# Altium PCB buoy_controller_v1.PcbDoc
Units mm, origin at the board's own origin, x right, y up, seen from the top; angles counter-clockwise.
Board outline 65 x 85 mm, 4 copper layers (Top Layer 1, Mid Layer 1, Mid Layer 2, Bottom Layer 1), stack 0.487 mm thick; 37 components, 33 nets, 180 pads, 75 vias.
Unrouted connection lines stored in the file: 37.
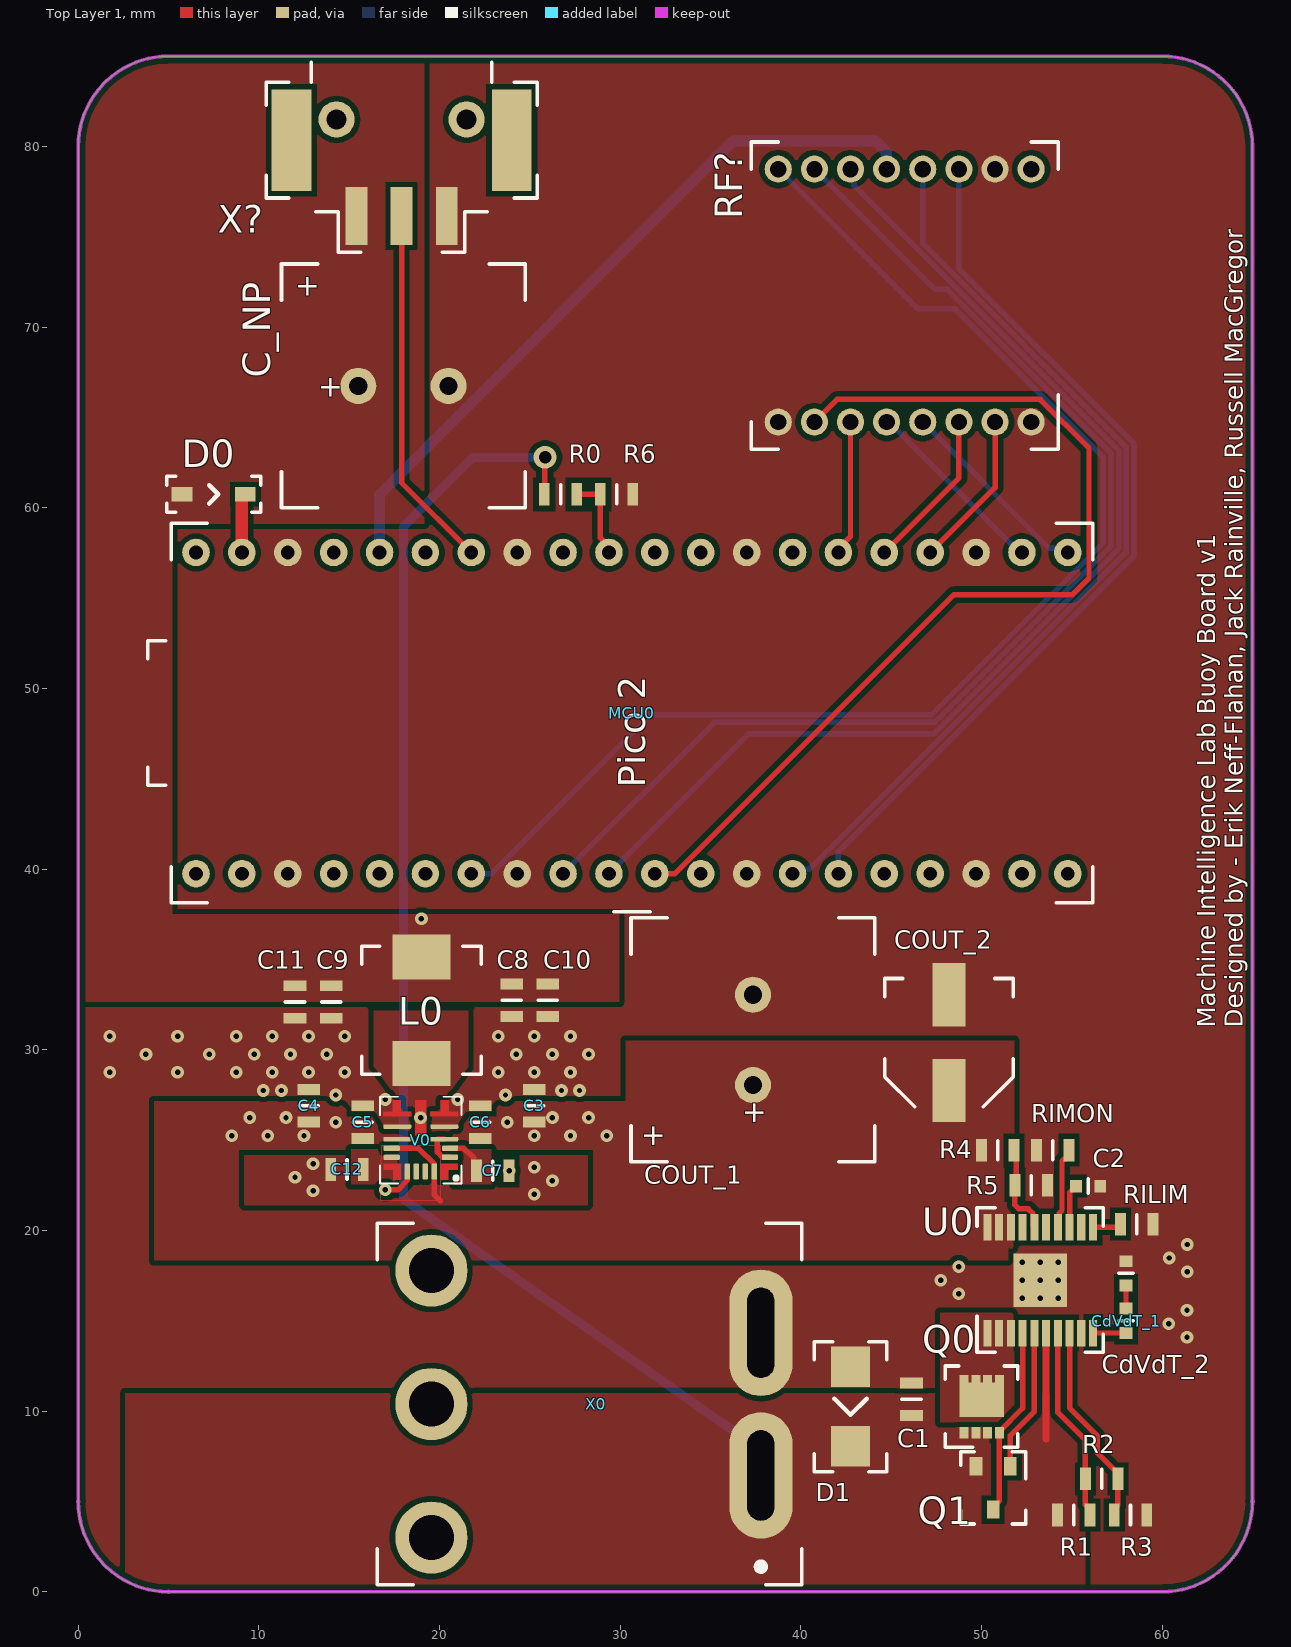
[diagram p0: Top Layer 1 view]
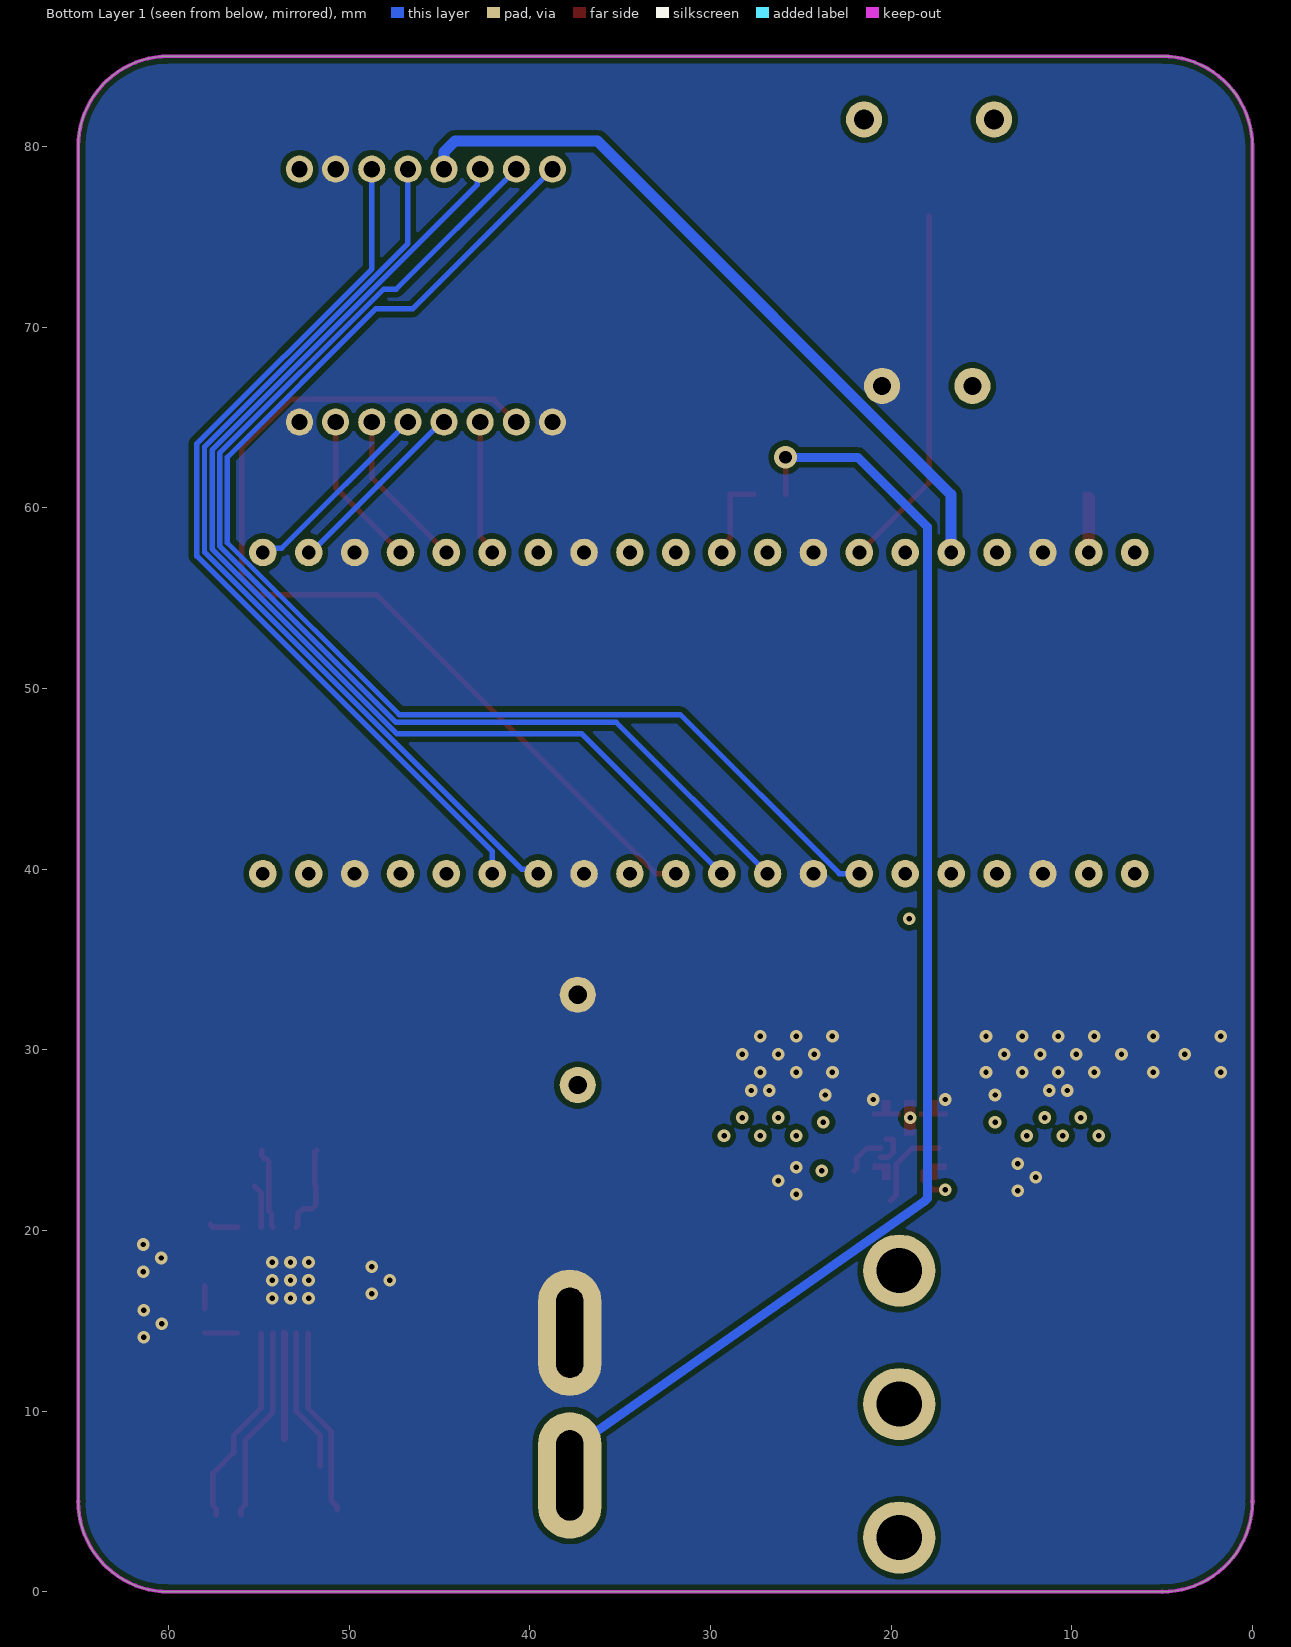
[diagram p1: Bottom Layer 1 view, seen from below]
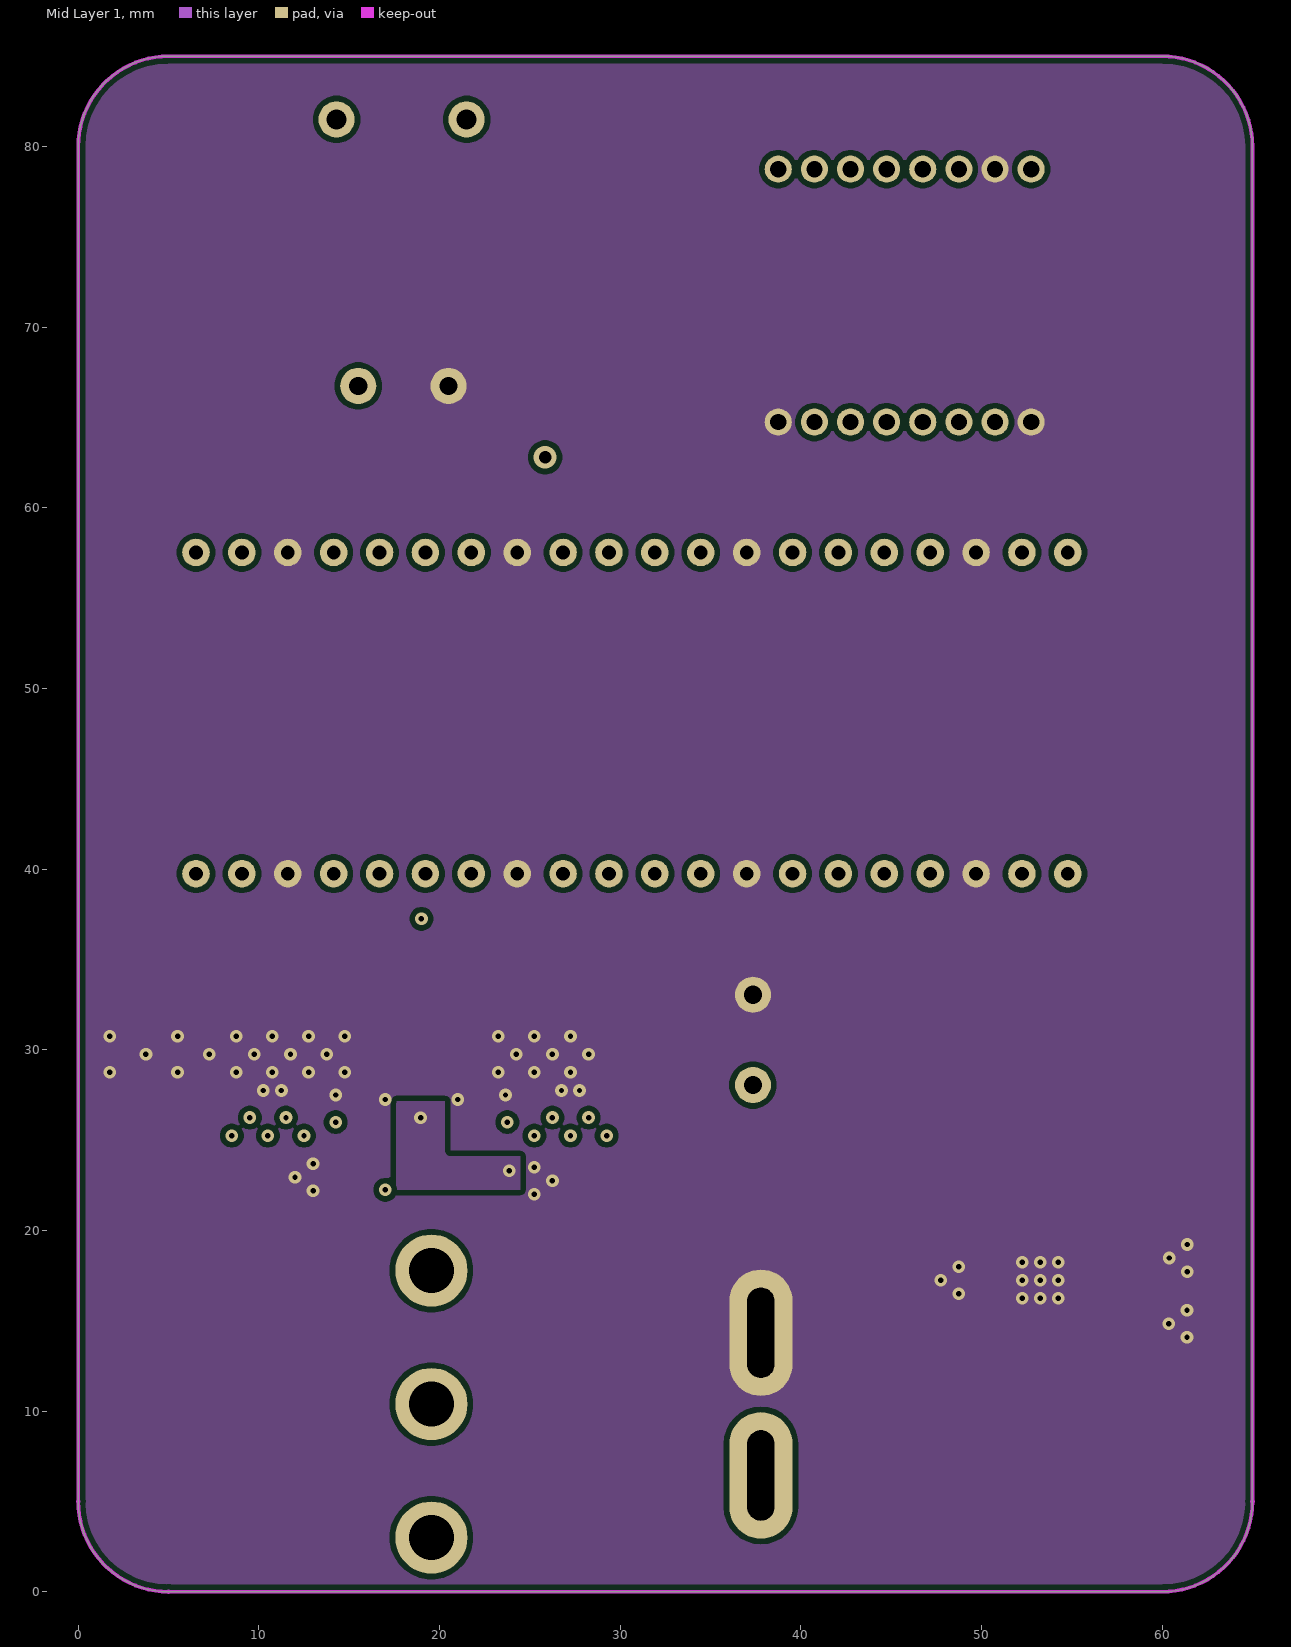
[diagram p2: Mid Layer 1]
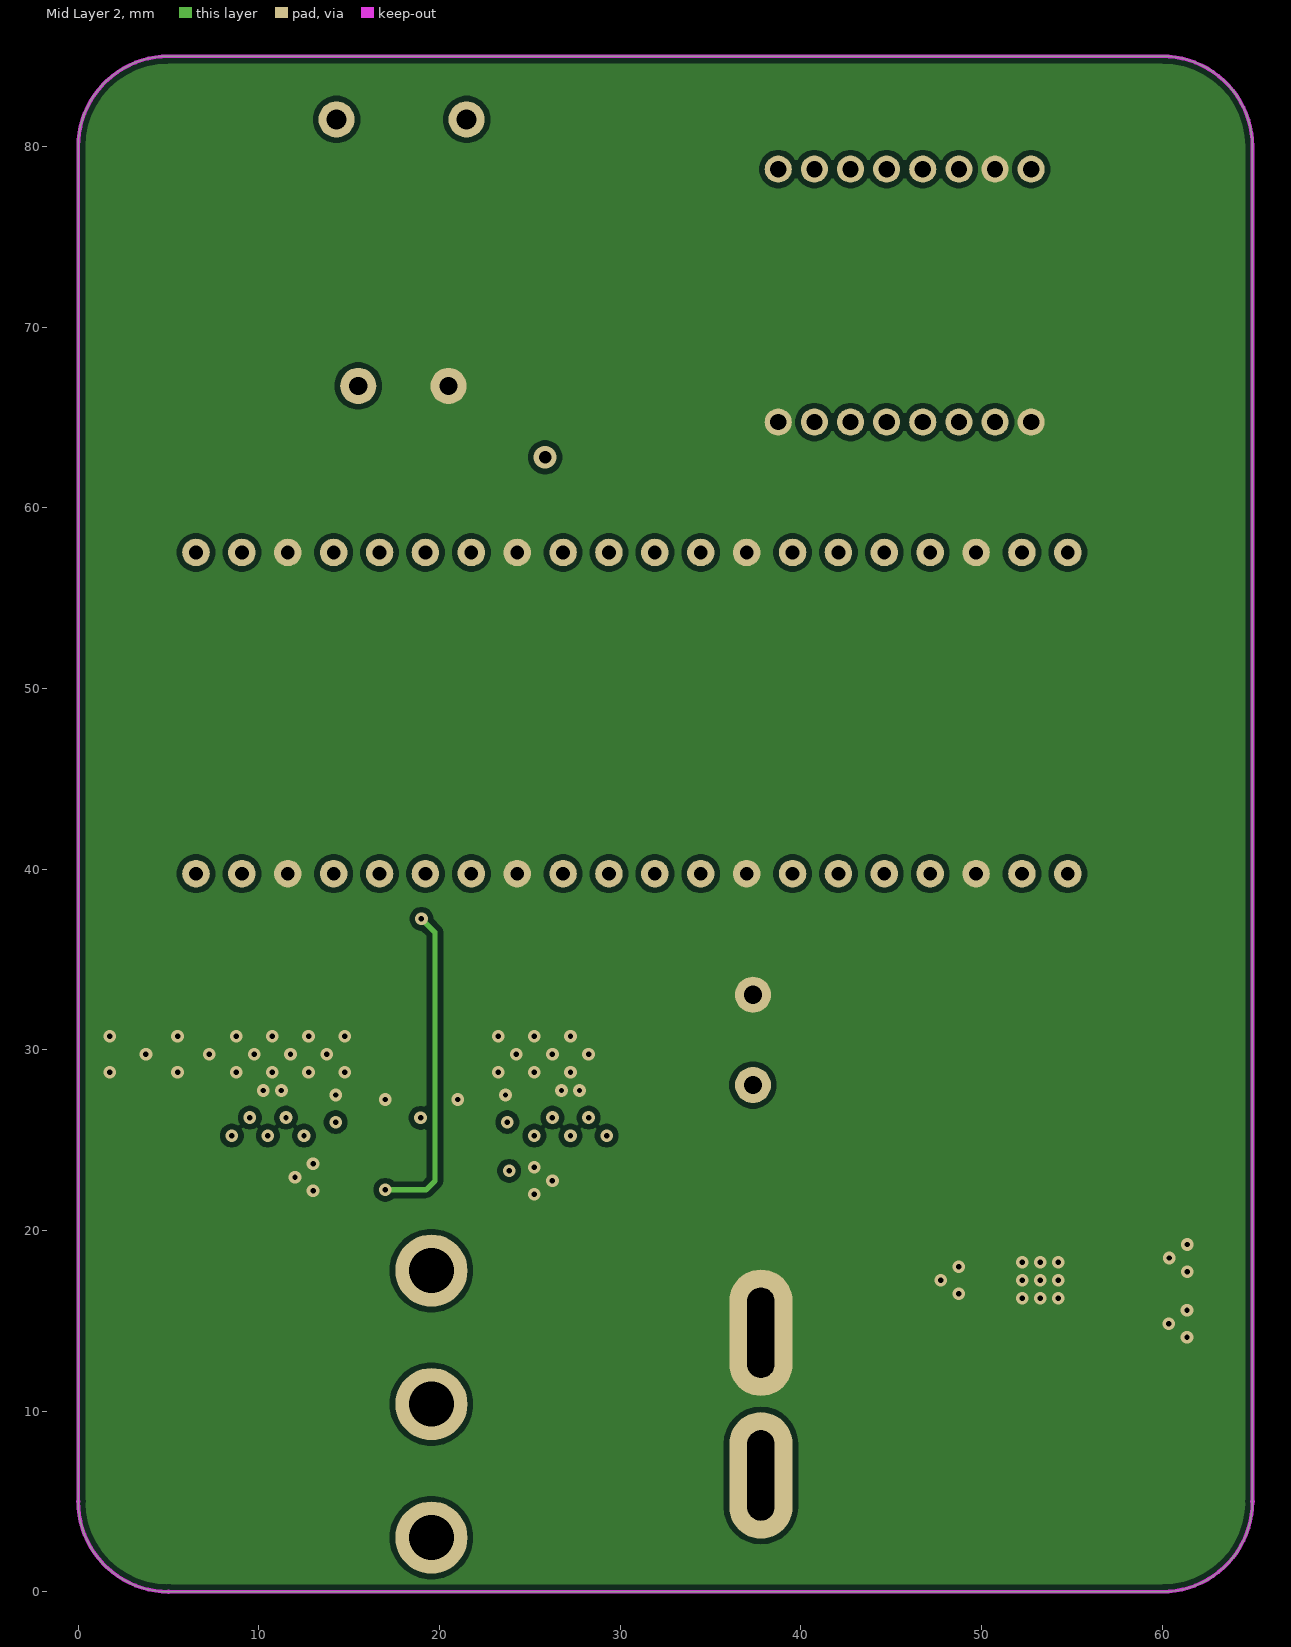
[diagram p3: Mid Layer 2]

## Layer stack, top to bottom
Top Solder: solder mask 0.0102, Solder Resist, Dk 3.5
Top Layer 1: signal copper 0.035
Dielectric 2: prepreg 0.0711, PP-006, Dk 4.1
Mid Layer 1: signal copper 0.0356
Dielectric 1: core 0.2032, Core-025, Dk 4.6
Mid Layer 2: signal copper 0.0356
Dielectric 3: prepreg 0.0711, PP-006, Dk 4.1
Bottom Layer 1: signal copper 0.035
Bottom Solder: solder mask 0.0102, Solder Resist, Dk 3.5

## Board outline
5,0 cw(c5,5) 0,5 0,80 cw(c5,80) 5,85 60,85 cw(c60,80) 65,80 65,5 cw(c60,5) 60,0

## Design rules (kind name [scope] priority, off if disabled: settings)
BoardOutlineClearance [All] p1: gap=0.2 ignorepadtopadclearanceinfootprint=FALSE
Clearance "inPolygon Clearance" [InPolygon] p1: gap=0.3 ignorepadtopadclearanceinfootprint=TRUE // this rule ensures that every net within a polygon of a different net has a set clearance from the poly
Clearance "High Current Polygon Clearance" [(InPolygon AND InNetClass('High_Current_Nets'))] p2: gap=0 ignorepadtopadclearanceinfootprint=TRUE // this rule ensures that every net within a polygon of a different net has a set clearance from the poly
Clearance "Different Diff Pair" [All] p3: gap=0.2 ignorepadtopadclearanceinfootprint=TRUE
Clearance "Same Diff Pair" [All] p4: gap=0.1 ignorepadtopadclearanceinfootprint=TRUE
Clearance "Different Nets" [not InAnyDifferentialPair] p5: gap=0.3 ignorepadtopadclearanceinfootprint=TRUE except(0.1: Arc-SMDPad Arc-THPad Arc-Via Arc-Text Track-SMDPad Track-THPad Track-Via Track-Text SMDPad-Text THPad-Text Via-Text Fill-Text Poly-Text Region-Text Text-Text; 0.12: Arc-Arc Arc-Track Track-Track; 0.15: SMDPad-SMDPad SMDPad-THPad SMDPad-Via THPad-THPad THPad-Via Via-Via; 0.2: Arc-Hole Track-Hole SMDPad-Hole THPad-Hole Via-Hole Fill-Hole Poly-Hole Region-Hole Text-Hole)
Clearance "Same Net" [not InAnyDifferentialPair] p6: gap=0 ignorepadtopadclearanceinfootprint=TRUE except(0.1: THPad-Via; 0.18: Arc-Arc Arc-Track Track-Track)
ComponentClearance [All] p1: gap=0.102 collisioncheckmode=3 verticalgap=0.102 showdistances=TRUE
DiffPairsRouting "Ethernet Routing" [InDifferentialPairClass('Ethernet_Pairs')] p1: maxlimit=0.25 minlimit=0.2 mostfreqgap=0.25 toplayer_maxgap=0.2 toplayer_prefgap=0.2 toplayer_minwidth=0.25 toplayer_maxwidth=0.25 toplayer_prefwidth=0.25 midlayer1_mingap=0.25 midlayer1_minwidth=0.19 midlayer1_maxwidth=0.19 midlayer1_prefwidth=0.19 midlayer2_mingap=0.25 midlayer2_minwidth=0.19 midlayer2_maxwidth=0.19 midlayer2_prefwidth=0.19 bottomlayer_maxgap=0.2 bottomlayer_prefgap=0.2 bottomlayer_minwidth=0.25 bottomlayer_maxwidth=0.25 bottomlayer_prefwidth=0.25 impedanceprofiledriven=TRUE maxuncoupledlength=12.7
DiffPairsRouting "USB Routing" [InDifferentialPairClass('USB_Pairs')] p2: maxlimit=0.291 minlimit=0.127 mostfreqgap=0.291 toplayer_maxgap=0.127 toplayer_prefgap=0.127 toplayer_minwidth=0.23 toplayer_maxwidth=0.23 toplayer_prefwidth=0.23 midlayer1_mingap=0.291 midlayer1_minwidth=0.25 midlayer1_maxwidth=0.25 midlayer1_prefwidth=0.25 midlayer2_mingap=0.291 midlayer2_minwidth=0.25 midlayer2_maxwidth=0.25 midlayer2_prefwidth=0.25 bottomlayer_maxgap=0.127 bottomlayer_prefgap=0.127 bottomlayer_minwidth=0.23 bottomlayer_maxwidth=0.23 bottomlayer_prefwidth=0.23 maxuncoupledlength=12.7
DiffPairsRouting "CAN Routing" [InDifferentialPairClass('CAN_Pairs')] p3: maxlimit=0.907 minlimit=0.5 mostfreqgap=0.907 toplayer_maxgap=0.5 toplayer_prefgap=0.5 toplayer_minwidth=0.201 toplayer_maxwidth=0.201 toplayer_prefwidth=0.201 midlayer1_mingap=0.907 midlayer1_minwidth=0.155 midlayer1_maxwidth=0.155 midlayer1_prefwidth=0.155 midlayer2_mingap=0.907 midlayer2_minwidth=0.155 midlayer2_maxwidth=0.155 midlayer2_prefwidth=0.155 bottomlayer_maxgap=0.5 bottomlayer_prefgap=0.5 bottomlayer_minwidth=0.201 bottomlayer_maxwidth=0.201 bottomlayer_prefwidth=0.201 impedanceprofiledriven=TRUE maxuncoupledlength=12.7
Height [All] p1: minheight=0 maxheight=1816.048 prefheight=12.7
HoleSize [All] p1: absolutevalues=TRUE maxlimit=6.3 minlimit=0.3 maxpercent=80.000 minpercent=20.000
HoleToHoleClearance [All] p1: gap=0.25 allowstackedmicrovias=FALSE
MatchedLengths "XTAL Nets Matched Delays" [InNetClass('XTAL_Nets')] p1: tolerance=25.4 checknetsindiffpair=FALSE checkdiffpairvsdiffpair=TRUE checkxsignals=TRUE checkothers=TRUE usedelayunits=TRUE delaytolerance=10.000000
MatchedLengths "Diff Pair Matched Delays" [InDifferentialPairClass('Ethernet_Pairs') or InDifferentialPairClass('USB_Pairs') or InDifferentialPairClass('CAN_Pairs')] p2: tolerance=5 checknetsindiffpair=TRUE checkdiffpairvsdiffpair=FALSE checkxsignals=FALSE checkothers=FALSE usedelayunits=TRUE delaytolerance=100.000000 phasematching=TRUE phasedelaytolerance=5.000000 phasedistance=12.7
MinimumAnnularRing [All] p1: minimumring=0.2
MinimumSolderMaskSliver [All] p1: minsoldermaskwidth=0
PlaneClearance "Supply Net Clearance" [InNetClass('Supply_Nets')] p1: clearance=0.5
PlaneClearance "All Nets" [All] p2: clearance=0.3
PlaneConnect [All] p1: planeconnectstyle=Direct reliefexpansion=0.508 reliefentries=4 reliefconductorwidth=0.254 reliefairgap=0.254
PolygonConnect "High Current" [InNetClass('High_Current_Nets')] p1: thpad.connectstyle=Relief thpad.reliefconductorwidth=0.4 thpad.reliefentries=4 thpad.polygonreliefangle="90 Angle" thpad.airgapwidth=0.1 thpad.conductorbypadedge=TRUE thpad.mindistance=0.381 thpad.enablemindistance=FALSE smdpad.connectstyle=Direct smdpad.reliefconductorwidth=0.254 smdpad.reliefentries=4 smdpad.polygonreliefangle="90 Angle" smdpad.airgapwidth=0.254 via.connectstyle=Direct via.reliefconductorwidth=0.254 via.reliefentries=4 via.polygonreliefangle="90 Angle" via.airgapwidth=0.254
PolygonConnect "Supply Nets" [InNetClass('Supply_Nets') OR InNetClass('Supply_Net')] p2: connectstyle=Relief reliefconductorwidth=0.3 reliefentries=4 polygonreliefangle="90 Angle" conductorbypadedge=TRUE mindistance=0.381 enablemindistance=FALSE airgapwidth=0.254
PolygonConnect General [All] p3: connectstyle=Direct reliefconductorwidth=0.254 reliefentries=4 polygonreliefangle="90 Angle" airgapwidth=0.254
RoutingVias [All] p1: holewidth=0.2 width=0.35 viastyle="Through Hole" minholewidth=0.15 minwidth=0.3 maxholewidth=6.3 maxwidth=6.55
SilkToSilkClearance [All] p1: silktosilkclearance=0
SilkToSolderMaskClearance [All] p1: minsilkscreentomaskgap=0 clearancetoexposedcopper=TRUE
SolderMaskExpansion [All] p1: expansion=0.075 istentingtop=FALSE
SupplyNets "Schematic Supply Nets_1" [InNet('+5')] p1: voltage=0.000
SupplyNets "Schematic Supply Nets_3" [InNet('GND')] p2: voltage=0.000
UnRoutedNet [All] p1: checkbadconnections=TRUE
Width "nRF Width" [InNetClass('nRF Signal')] p1: maxlimit=0.379 minlimit=0.263 preferedwidth=0.379 toplayer_minwidth=0.379 midlayer1_maxwidth=0.263 midlayer1_prefwidth=0.263 midlayer2_maxwidth=0.263 midlayer2_prefwidth=0.263 bottomlayer_minwidth=0.379 minimp=50.000000 maximp=50.000000 favimp=50.000000 checkconnectedcopper=TRUE
Width [All] p2: maxlimit=100 minlimit=0.1 preferedwidth=0.5 toplayer_minwidth=0.3 midlayer1_prefwidth=0.2 midlayer2_prefwidth=0.2 bottomlayer_minwidth=0.3 minimp=50.000000 maximp=50.000000 favimp=50.000000
19 further rules are at their usual default settings.

## Components (designator, comment, footprint, x,y, rotation, side; value= is the part's Value field where it differs from the comment)
C1 "[Cap] 0805 2.2uF 10% 50V" "[Cap] SMD 0805" 46.127,10.65 r270 top
C2 "[Cap] 0603 0.1uF 10% 50V" "[Cap] SMD 0603" 55.9,22.45 r0 top
C3 "[Cap] 0805 4.7uF 10% 50V" "[Cap] SMD 0805" 25.25,26.9 r270 top
C4 "[Cap] 0805 4.7uF 10% 50V" "[Cap] SMD 0805" 12.75,26.9 r270 top
C5 "[Cap] 0805 0.1uF 10% 50V" "[Cap] SMD 0805" 15.75,26 r270 top
C6 "[Cap] 0805 0.1uF 10% 50V" "[Cap] SMD 0805" 22.25,26 r270 top
C7 "[Cap] 0805 0.1uF 10% 50V" "[Cap] SMD 0805" 22.95,23.3 r180 top
C8 "[Cap] 0805 4.7uF 10% 50V" "[Cap] SMD 0805" 24,32.75 r90 top
C9 "[Cap] 0805 4.7uF 10% 50V" "[Cap] SMD 0805" 14,32.65 r90 top
C10 "[Cap] 0805 4.7uF 10% 50V" "[Cap] SMD 0805" 26,32.75 r90 top
C11 "[Cap] 0805 4.7uF 10% 50V" "[Cap] SMD 0805" 12,32.65 r90 top
C12 "[Cap] 0805 2.2uF 10% 50V" "[Cap] SMD 0805" 14.877,23.377 r0 top
C_NP "[Cap] Thru-Hole 1000uF 20% 35V" "[Cap] Thru-Hole Polarized 10mm" 18,66.75 r0 top
CdVdT_1 "[Cap] 0603 1uF 10% 25V" "[Cap] SMD 0603" 58,15 r270 top
CdVdT_2 "[Cap] 0603 1uF 10% 25V" "[Cap] SMD 0603" 58,17.625 r270 top
COUT_1 "[Cap] Thru-Hole 1000uF 20% 35V" "[Cap] Thru-Hole Polarized 10mm" 37.35,30.55 r90 top
COUT_2 "[Cap] 6.3mm 100uF 20% 35V" "[Cap] SMD Polarized, 6.3mm" 48.2,30.4 r90 top
D0 "SOD123" "[Diode] SMD SOD-123" 7.5,60.75 r0 top
D1 "DO-214AA" "[Diode] SMD DO-214AA" 42.75,10.25 r270 top
L0 "[2.2uH] SMD Nonstandard 10A" "[Inductor] SMD 7.4 X 6.6 X 3 MM" 19,32.187 r90 top
MCU0 "Pico 2" "[Pi] Pico 2" 5.15,48.64 r90 top
Q0 "CSD19537Q3" 8-VSON-CLIP 50,10.25 r0 top
Q1 "2N7002" SOT-23 50.65,5.75 r270 top
R0 "[10k] SMD 0805 5% 1/8W" "[Res] SMD 0805" 26.7,60.75 r180 top
R1 "[52.3k] SMD 0805 1% 1/8W" "[Res] SMD 0805" 55.1,4.25 r180 top
R2 "[52.3k] SMD 0805 1% 1/8W" "[Res] SMD 0805" 56.65,6.25 r180 top
R3 "[52.3k] SMD 0805 1% 1/8W" "[Res] SMD 0805" 58.25,4.25 r180 top
R4 "[52.3k] SMD 0805 1% 1/8W" "[Res] SMD 0805" 50.9,24.45 r180 top
R5 "[52.3k] SMD 0805 1% 1/8W" "[Res] SMD 0805" 52.75,22.5 r180 top
R6 "[10k] SMD 0805 5% 1/8W" "[Res] SMD 0805" 29.8,60.75 r180 top
RF? "[LoRa] SX1276 RFM95 Breakout" "[LoRa] SX1276 RFM95 Breakout" 53.75,63.75 r90 top
RILIM "[52.3k] SMD 0805 1% 1/8W" "[Res] SMD 0805" 58.6,20.35 r180 top
RIMON "[52.3k] SMD 0805 1% 1/8W" "[Res] SMD 0805" 53.95,24.45 r0 top
U0 "TPS26631PWPT" "[E-Fuse] 4.5-60V 6A" 53.25,17.25 r90 top
V0 "MAX20410AFOA/VY+" "[Switching] 17-PowerWFQFN" 18.962,25 r180 top
X0 "Anderson 2pos Right-Angle" "[Anderson] 2pos Right-Angle 1327G17" 19.55,10.39 r270 top
X? "[Pheonix] 3pin 2.5mm pitch" "[Pheonix] 3pin 2.5mm pitch" 17.9,76.15 r180 top

## Footprints (in the part's own frame and the unit in brackets; to place one, negate y for a bottom-side part, rotate by r counter-clockwise, add the part's x,y. Pads: shape width x height; smd on the part's side, far side on the other; paste and mask are expansions set on the pad)
8-VSON-CLIP [mm]
  rect 0.5x0.63 smd: 1(0.985,-1.445) 2(-0.965,-1.445) 2(-0.315,-1.445) 2(0.335,-1.445)
  rect 0.5x0.41 smd: 3(-0.965,1.535) 3(-0.315,1.535) 3(0.335,1.535) 3(0.985,1.535)
  rect 2.45x1.9 smd: 3(0.01,0.38)
  silkscreen extent -2,-2.25 2,2.25, body extent -1.65,-1.65 1.65,1.65, height 1.1
"[Anderson] 2pos Right-Angle 1327G17" [mm]
  oval 7x3.5 hole 1.5 slot 5 at 0 deg: 1(3.95,18.24) 2(-3.95,18.24)
  round 4 hole 2.5: MH(-7.39,0) MH(0,0) MH(7.39,0)
  silkscreen extent -10,-3 10,20.5, body extent -8.4,-9.86 7.9,18.74, height 8.4
"[Cap] SMD 0603" [mm]
  rect 0.65x0.7 smd: 1(-0.675,0) 2(0.675,0)
  silkscreen extent 0,-0.4 0,0.4, body extent -0.8,-0.45 0.8,0.45, height 0.8
"[Cap] SMD 0805" [mm]
  rect 0.6x1.25 smd: 1(-0.9,0) 2(0.9,0)
  silkscreen extent 0,-0.53 0,0.53, body extent -1,-0.63 1,0.63, height 1
"[Cap] SMD Polarized, 6.3mm" [mm]
  rect 3.5x1.85 smd: 1(-2.65,0) 2(2.65,0)
  silkscreen extent -3.55,-3.55 3.55,3.55, body extent -3.7,-3.4 3.7,3.4, height 6.1
"[Cap] Thru-Hole Polarized 10mm" [mm]
  round 2 hole 1: 1(-2.5,0) 2(2.5,0)
  silkscreen extent -6.75,-6.75 6.75,6.75, body extent -6.5,-6.49 6.5,6.49, height 26.5
"[Diode] SMD DO-214AA" [mm]
  rect 2.25x2.15 smd: 1(2.2,0) 2(-2.2,0)
  silkscreen extent -3.6,-2 3.6,2, body extent -2.68,-1.75 2.68,1.75, height 2.3
"[Diode] SMD SOD-123" [mm]
  rect 1.15x0.8 smd: 1(1.75,0) 2(-1.75,0)
  silkscreen extent -2.6,-1 2.6,1, body extent -1.85,-0.8 1.86,0.8, height 1.35
"[E-Fuse] 4.5-60V 6A" [mm] "TPS26631PWPT"
  rect 1.475x0.45 smd: 1(-2.938,2.925) 2(-2.938,2.275) 3(-2.938,1.625) 4(-2.938,0.975) 5(-2.938,0.325) 6(-2.938,-0.325) 7(-2.938,-0.975) 8(-2.938,-1.625) 9(-2.938,-2.275) 10(-2.938,-2.925) 11(2.938,-2.925) 12(2.938,-2.275) 13(2.938,-1.625) 14(2.938,-0.975) 15(2.938,-0.325) 16(2.938,0.325) 17(2.938,0.975) 18(2.938,1.625) 19(2.938,2.275) 20(2.938,2.925)
  rect 2.96x2.96 smd: 21(0,0)
  silkscreen extent -4,-3.5 4,3.5, body extent -3.2,-3.25 3.2,3.25, height 1.2
"[Inductor] SMD 7.4 X 6.6 X 3 MM" [mm]
  rect 2.5x3.2 smd: 1(-2.95,0) 2(2.95,0)
  silkscreen extent -3.55,-3.3 3.55,3.3, body extent -3.55,-3.3 3.55,3.3, height 3
"[LoRa] SX1276 RFM95 Breakout" [mm]
  round 1.5 hole 0.9: 1(1,1) 2(1,3) 3(1,5) 4(1,7) 5(1,9) 6(1,11) 7(1,13) 8(1,15) 9(15,1) 10(15,3) 11(15,5) 12(15,7) 13(15,9) 14(15,11) 15(15,13) 16(15,15)
  silkscreen extent -0.5,-0.5 16.5,16.5, body extent 0,0 16,16, height 4.8
"[Pheonix] 3pin 2.5mm pitch" [mm] "1778777"
  rect 1.2x3.2 smd: 1(-2.5,0) 2(0,0) 3(2.5,0)
  rect 2.2x5.6 smd: MP(-6.1,-4.2) MP(6.1,-4.2)
  round 2 hole 1.1: MP(-3.6,-5.35) MP(3.6,-5.35)
  silkscreen extent -7.5,-8.5 7.5,2, body extent -6.55,-8.17 6.55,1.33, height 5
"[Pi] Pico 2" [mil]
  round 60 hole 30: 1(-350,-53.94) 2(-350,-153.94) 3(-350,-253.94) 4(-350,-353.94) 5(-350,-453.94) 6(-350,-553.94) 7(-350,-653.94) 8(-350,-753.94) 9(-350,-853.94) 10(-350,-953.94) 11(-350,-1053.94) 12(-350,-1153.94) 13(-350,-1253.94) 14(-350,-1353.94) 15(-350,-1453.94) 16(-350,-1553.94) 17(-350,-1653.94) 18(-350,-1753.94) 19(-350,-1853.94) 20(-350,-1953.94) 21(350,-1953.94) 22(350,-1853.94) 23(350,-1753.94) 24(350,-1653.94) 25(350,-1553.94) 26(350,-1453.94) 27(350,-1353.94) 28(350,-1253.94) 29(350,-1153.94) 30(350,-1053.94) 31(350,-953.94) 32(350,-853.94) 33(350,-753.94) 34(350,-653.94) 35(350,-553.94) 36(350,-453.94) 37(350,-353.94) 38(350,-253.94) 39(350,-153.94) 40(350,-53.94)
  silkscreen extent -433,-2008 413,51, body extent -413,-2008 413,43, height 287
"[Res] SMD 0805" [mm]
  rect 0.6x1.25 smd: 1(-0.9,0) 2(0.9,0)
  silkscreen extent 0,-0.53 0,0.53, body extent -1,-0.63 1,0.63, height 0.5
"[Switching] 17-PowerWFQFN" [mm]
  rrect50% 0.9x0.3 smd: 1(-1.612,0.95) 2(-1.612,0.45) 10(1.612,0.45) 11(1.612,0.95)
  rrect50% 1.55x0.25 smd: 3(-1.299,-0.05) 4(-1.299,-0.75) 8(1.3,-0.75) 9(1.3,-0.05)
  round 0.025 smd: 5(-1.3,-1.763) 6(0,-1.238) 7(1.3,-1.763) 12(1.3,1.75) 12(1.787,1.475) 17(-1.788,1.475) 17(-1.3,1.75)
  rect 0.127x0.127 smd paste-0.064 mask-0.064: 10(1.612,0.45) 11(1.612,0.95)
  rrect50% 0.3x0.9 smd: 13(0.75,1.736) 14(0.25,1.736) 15(-0.25,1.737) 16(-0.75,1.737)
  Top Layer 1 region: 1.1,-1.575 0.525,-1.575 0.525,-1.325 2.075,-1.325 2.075,-1.575 1.55,-1.575 1.55,-2.2 1.1,-2.2
  Top Layer 1 region: -1.1,-1.575 -0.525,-1.575 -0.525,-1.325 -2.075,-1.325 -2.075,-1.575 -1.55,-1.575 -1.55,-2.2 -1.1,-2.2
  Top Layer 1 region: 2.05,1.65 1.525,1.65 1.525,1.3 2.05,1.3
  Top Layer 1 region: 1.525,1.65 1.525,1.3 1.075,1.3 1.075,2.2 1.525,2.2
  Top Layer 1 region: -2.05,1.65 -1.525,1.65 -1.525,1.3 -2.05,1.3
  Top Layer 1 region: -1.525,1.65 -1.525,1.3 -1.075,1.3 -1.075,2.2 -1.525,2.2
  Top Layer 1 region: -0.3,-0.275 0.3,-0.275 0.3,-2.2 -0.3,-2.2
  silkscreen extent -2.25,-2.4 2.25,2.4, body extent -1.75,-1.88 1.75,1.88, height 0.8
SOT-23 [mm]
  rect 1x0.7 smd: 1(-1.2,0.95) 2(-1.2,-0.95) 3(1.2,0)
  silkscreen extent -2,-1.8 2,1.8, body extent -1.2,-1.46 1.2,1.46, height 1.2

## Part data
C1 C12: "UMK212BB7225KG-T", Capacitance=2.2uF, Max Voltage=50V, Size Package=0805, Supplier Part Number 1=587-3169-1-ND, Tolerance=10%, Supplier 1=DigiKey
C2: "CL10B104KB8NNNC", Capacitance=100nF, Max Voltage=50V, Size Package=0603, Supplier Part Number 1=1276-1000-6-ND, Tolerance=10%, Supplier 1=DigiKey
C3 C4 C11: "GRT21BR61H475KE13L", Capacitance=4.7uF, Max Voltage=50V, Size Package=0805, Supplier Part Number 1=490-12394-1-ND, Tolerance=10%, Supplier 1=DigiKey
C5 C6 C7: "CL21B104KBCNNNC", Capacitance=100nF, Max Voltage=50V, Size Package=0805, Supplier Part Number 1=1276-1003-6-ND, Tolerance=10%, Supplier 1=DigiKey
C8 C9 C10: "GRT21BR61H475KE13L", Capacitance=47uF, Max Voltage=50V, Size Package=0805, Supplier Part Number 1=490-12394-1-ND, Tolerance=10%, Supplier 1=DigiKey
C_NP COUT_1: "35PK1000MEFC10X20", Capacitance=1000uF, Max Voltage=35V, Size Package=Thru-Hole, Supplier Part Number 1=1189-1742-ND, Tolerance=20%, Supplier 1=DigiKey
CdVdT_1 CdVdT_2: "CL10B105KA8NNNC", Capacitance=1uF, Max Voltage=25V, Size Package=0603, Supplier Part Number 1=1276-1184-1-ND, Tolerance=10%, Supplier 1=DigiKey
COUT_2: "EEE-FT1V101AP", Capacitance=100uF, Max Voltage=35V, Size Package=6.3mm, Supplier Part Number 1=PCE5016DKR-ND, Tolerance=20%, Supplier 1=DigiKey
D0: library part "[Schottky] SMD 40V 1A", "B5819W-TP", Supplier Part Number 1=B5819W-TPMSCT-ND, Supplier 1=DigiKey
D1: library part "[TVS] SMBJ33CA", "SMBJ33CA", Optimal Zener Voltage=33V, Supplier Part Number 1=SMBJ33CA-FDICT-ND, Supplier 1=DigiKey, Wattage=600W
L0: "ECS-MPIL0630-2R2MC", Inductance=2.2uH, Package="7.4 x 6.6mm", Supplier Part Number 1=XC2402CT-ND, Supplier 1=DigiKey
MCU0: library part "[Pi] Pico 2", "SC1631", Supplier Part Number 1=2648-SC1631TR-ND, Supplier 1=DigiKey
Q0: library part "[NMOS] SMD 100V 50A 14.5mOhm", Supplier Part Number 1=296-44351-6-ND, Supplier 1=DigiKey
Q1: library part "[NMOS] SMD 60V 115mA 7.5Ohm", Package=SOT-23-3, Supplier Part Number 1=2N7002NDKR-ND, IDS_Max=115mA, Supplier 1=DigiKey, VDS_Max=60V
R0 R6: "RC0603FR-0710KL", Resistance=10k, Size Package=0805, Supplier Part Number 1=311-10.0KHRDKR-ND, Tolerance=5%, Supplier 1=DigiKey, Wattage=1/10W
R1: "RC0805FR-0752K3L", Resistance=49.9k, Size Package=0805, Supplier Part Number 1=311-52.3KCRCT-ND, Tolerance=1%, Supplier 1=DigiKey, Wattage=1/8W
R2: "RC0805FR-0752K3L", Resistance=19.1k, Size Package=0805, Supplier Part Number 1=311-52.3KCRCT-ND, Tolerance=1%, Supplier 1=DigiKey, Wattage=1/8W
R3: "RC0805FR-0752K3L", Resistance=1Meg, Size Package=0805, Supplier Part Number 1=311-52.3KCRCT-ND, Tolerance=1%, Supplier 1=DigiKey, Wattage=1/8W
R4: "RC0805FR-0752K3L", Resistance=120k, Size Package=0805, Supplier Part Number 1=311-52.3KCRCT-ND, Tolerance=1%, Supplier 1=DigiKey, Wattage=1/8W
R5: "RC0805FR-0752K3L", Resistance=13.3k, Size Package=0805, Supplier Part Number 1=311-52.3KCRCT-ND, Tolerance=1%, Supplier 1=DigiKey, Wattage=1/8W
RILIM: "RC0805FR-0752K3L", Resistance=6.98k, Size Package=0805, Supplier Part Number 1=311-52.3KCRCT-ND, Tolerance=1%, Supplier 1=DigiKey, Wattage=1/8W
RIMON: "RC0805FR-0752K3L", Resistance=51.1k, Size Package=0805, Supplier Part Number 1=311-52.3KCRCT-ND, Tolerance=1%, Supplier 1=DigiKey, Wattage=1/8W
U0: library part "[E-Fuse] 4.5-60V 6A"
V0: library part "[Switching] SMD 0.8-10V 10A", Supplier Part Number 1=505-MAX20410AFOA/VY+-ND, Supplier 1=DigiKey
X0: library part "[Anderson] 2pos Right-Angle"
X?: "1778777", Supplier Part Number 1=277-2316-1-ND, Supplier 1=DigiKey
RF?: ComponentLink1Description="Amazon Link", ComponentLink1URL=https://www.amazon.com/Lubeby-Smart-Original-915Mhz-Transceiver/dp/B0BHLK9FC9, ComponentLink2Description="Makerfabs Link", ComponentLink2URL=https://www.makerfabs.com/sx1276-lora-module-915mhz-rfm95.html

## Via types
v1: diameter 0.7, hole 0.3, Top Layer 1 to Bottom Layer 1, 74 vias
v2: diameter 1.27, hole 0.711, Top Layer 1 to Bottom Layer 1, 1 vias

## Nets (pads, with @x,y where several pads share a name; then routed paths per layer and width w, separated by ;. In a path a pad name is that pad's centre, name@x,y a point inside that pad or via, vN(x,y) a via of type N, cw(c..) or ccw(c..) an arc to the next point about the centre after c; other vN are vias at no path point)
3V3_LoRa: MCU0.36 RF?.13 | length 40.6
  Bottom Layer 1 w0.6: MCU0.36 16.68,60.73 36.25,80.3 44.15,80.3 44.75,79.7 RF?.13
+5: C8.2 C9.2 C10.2 C11.2 C_NP.1 D0.2 L0.2 V0.13 X?.3 | length 19.7
  Top Layer 1 w0.3: v1(17,22.25) 17.691,22.25 18.212,22.771 V0.13
  Mid Layer 2 w0.3: v1(17,22.25) 19.25,22.25 19.75,22.75 19.75,36.5 v1(19,37.25)
+LiPo_22.2Vnom: C1.2 D1.1 Q0.2 Q1.2 R0.2 R1.2 U0.6 X0.1 | length 80.2
  Top Layer 1 w0.3: R0.2 25.825,60.775 25.825,62.775 v2(25.85,62.8) ; 53.55,8.45 53.575,8.475
  Top Layer 1 w0.4: 53.575,8.475 U0.6
  Bottom Layer 1 w0.5: v2(25.85,62.8) 21.85,62.8 18,58.95 18,21.775 18.12,21.655 37.79,7.846 X0.1
/SHDN_TPS2663: C2.1 U0.13 | length 2.4
  Top Layer 1 w0.3: U0.13 54.875,22.1 55.025,22.25 55.05,22.25 55.225,22.425 C2.1
adc_read: MCU0.31 R0.1 R6.2 | length 4.7
  Top Layer 1 w0.3: R0.1 R6.2 28.9,58.341 29.38,57.861 MCU0.31
B_GATE_TPS2663: Q0.1 Q1.3 U0.4 | length 10.4
  Top Layer 1 w0.3: Q1.3 50.65,4.7 50.985,5.035 Q0.1 50.985,8.87 52.275,10.16 U0.4
BIAS_MAX20410: C12.2 V0.11 V0.12
BST_MAX20410: C7.2 V0.2 | length 2.3
  Top Layer 1 w0.3: V0.2 21.355,24.55 21.9,24.005 21.9,23.45 C7.2
CS0_PICO: MCU0.22 RF?.5 | length 10.5
  Bottom Layer 1 w0.3: RF?.5 44.885,64.75 52.105,57.53 MCU0.22
DIO0_LoRa: MCU0.10 RF?.14 | length 62.8
  Bottom Layer 1 w0.3: MCU0.10 37.13,47.5 47.369,47.5 57.59,57.721 57.59,63.204 42.921,77.873 42.921,78.579 RF?.14
DIO1_LoRa: MCU0.9 RF?.15 | length 65.9
  Bottom Layer 1 w0.3: MCU0.9 35.218,48.128 47.403,48.128 57.17,57.895 57.17,63.03 48.1,72.1 47.4,72.1 RF?.15
DIO2_LoRa: MCU0.7 RF?.16 | length 71.9
  Bottom Layer 1 w0.3: MCU0.7 22.869,39.75 31.666,48.548 47.229,48.548 56.75,58.069 56.75,62.8 48.54,71.01 46.49,71.01 RF?.16
DIO3_LoRa: MCU0.15 RF?.11 | length 49.8
  Bottom Layer 1 w0.3: MCU0.15 42.08,40.98 58.43,57.33 58.43,63.552 48.75,73.232 RF?.11
DIO4_LoRa: MCU0.14 RF?.12 | length 51.7
  Bottom Layer 1 w0.3: MCU0.14 39.774,39.984 40.447,39.984 58.01,57.547 58.01,63.378 46.75,74.638 RF?.12
DIO5_LoRa: MCU0.11 RF?.7 | length 54.8
  Top Layer 1 w0.3: MCU0.11 33.029,39.75 48.479,55.2 55.032,55.2 55.95,56.118 55.95,63.3 53.25,66 42,66 RF?.7
DRV_TPS2663: Q1.1 U0.5 | length 7.9
  Top Layer 1 w0.3: Q1.1 51.6,8.65 52.925,9.975 U0.5
GND: C1.1 C2.2 C3.1 C4.1 C5.1 C6.1 C8.1 C9.1 C10.1 C11.1 C12.1 C_NP.2 CdVdT_2.1 COUT_1.2 COUT_2.2 D1.2 MCU0.3 MCU0.8 MCU0.13 MCU0.18 MCU0.23 MCU0.28 MCU0.33 MCU0.38 R3.1 R5.1 R6.1 RF?.1 RF?.8 RF?.10 RILIM.1 RIMON.1 U0.9 U0.21 V0.4 V0.5 V0.7 V0.8 V0.10 V0.16 X0.2 X?.1 | length 4.9
  Top Layer 1 w0.3: V0.10@17.35,24.55 18.835,24.55 19.712,23.673 V0.16 19.712,21.968 20.03,21.65
  other v1: 61.375,14.086 60.375,14.836 61.375,15.586 52.25,16.25 53.25,16.25 54.25,16.25 48.75,16.5 47.75,17.25 52.25,17.25 53.25,17.25 54.25,17.25 61.396,17.725 48.75,18 52.25,18.25 53.25,18.25 54.25,18.25 60.396,18.475 61.396,19.225 25.25,22 13,22.2 26.25,22.75 12,22.95 25.25,23.5 13,23.7 17,27.25 21,27.25 14.25,27.5 23.65,27.5 10.25,27.75 11.25,27.75 26.75,27.75 27.75,27.75 1.75,28.75 5.5,28.75 8.75,28.75 10.75,28.75 12.75,28.75 14.75,28.75 23.25,28.75 25.25,28.75 27.25,28.75 3.75,29.75 7.25,29.75 9.75,29.75 11.75,29.75 13.75,29.75 24.25,29.75 26.25,29.75 28.25,29.75 1.75,30.75 5.5,30.75 8.75,30.75 10.75,30.75 12.75,30.75 14.75,30.75 23.25,30.75 25.25,30.75 27.25,30.75
LX_MAX20410: C7.1 L0.1 V0.6
  other v1: 23.85,23.3 18.951,26.237
MISO0_PICO: MCU0.21 RF?.4 | length 11
  Bottom Layer 1 w0.3: RF?.4 53.736,57.764 54.546,57.764 MCU0.21
MOSI0_PICO: MCU0.25 RF?.3 | length 8.9
  Top Layer 1 w0.3: MCU0.25 48.75,61.66 RF?.3
NetCdVdT_1_1: CdVdT_1.1 CdVdT_2.2 | length 1.3
  Top Layer 1 w0.3: CdVdT_1.1 CdVdT_2.2
NetCdVdT_1_2: CdVdT_1.2 U0.10 | length 1.8
  Top Layer 1 w0.3: U0.10@56.188,14.325 CdVdT_1.2
NetD0_1: D0.1 MCU0.39 | length 3.3
  Top Layer 1 w0.3: D0.1@9.06,60.56 D0.1
  Top Layer 1 w0.7: MCU0.39 D0.1@9.06,60.56
NetRILIM_2: RILIM.2 U0.11 | length 1.6
  Top Layer 1 w0.3: U0.11 57.55,20.188 57.7,20.338 RILIM.2
NetRIMON_2: RIMON.2 U0.14 | length 4.6
  Top Layer 1 w0.3: U0.14 54.3,20.263 54.3,20.95 54.455,21.105 54.455,23.834 54.596,23.975 54.7,23.975 54.85,24.125 RIMON.2
NP_PICO: MCU0.34 X?.2 | length 20.2
  Top Layer 1 w0.3: X?.2 17.9,61.39 MCU0.34
OVP_TPS2663: R2.1 R3.2 U0.8 | length 11.3
  Top Layer 1 w0.3: U0.8 54.875,10.175 56.4,8.65 56.4,7.706 57.381,6.725 57.4,6.725 57.55,6.575 57.55,4.775 57.35,4.575 R3.2
PGTH_TPS2663: R4.1 R5.2 U0.16 | length 5.1
  Top Layer 1 w0.3: R4.1 51.917,24.333 51.917,22.567 R5.2 51.85,21.409 52.067,21.192 52.587,21.192 52.85,20.929 52.85,20.263 U0.16
RESET_LoRa: MCU0.26 RF?.6 | length 7.5
  Top Layer 1 w0.3: MCU0.26 42.08,57.734 42.75,58.404 RF?.6
SCK0_PICO: MCU0.24 RF?.2 | length 8.7
  Top Layer 1 w0.3: MCU0.24 50.75,61.12 RF?.2
UVLO_TPS2663: R1.1 R2.2 U0.7 | length 10.8
  Top Layer 1 w0.3: U0.7 54.225,9.925 55.75,8.4 R2.2 55.75,4.825 56,4.575 R1.1
VIN_TPS2663: Q0.3 U0.1 U0.2 U0.3
VSUP_MAX20410: C3.2 C4.2 C5.2 C6.2 COUT_1.1 COUT_2.1 R4.2 U0.18 U0.19 U0.20 V0.1 V0.3 V0.9 | length 1.9
  Top Layer 1 w0.3: V0.3 19.9,25.05 19.875,25.025 19.875,24.34 20.165,24.05 V0.1
  other v1: 8.5,25.25 10.5,25.25 12.5,25.25 25.25,25.25 27.25,25.25 29.25,25.25 14.25,26 23.75,26 9.5,26.25 11.5,26.25 26.25,26.25 28.25,26.25
pads on no net: MCU0.1 MCU0.2 MCU0.4 MCU0.5 MCU0.6 MCU0.12 MCU0.16 MCU0.17 MCU0.19 MCU0.20 MCU0.27 MCU0.29 MCU0.30 MCU0.32 MCU0.35 MCU0.37 MCU0.40 RF?.9 U0.12 U0.15 U0.17 V0.14 V0.15 V0.17 X0.MH X?.MP

## Polygon pours and split planes (outlines as drawn)
LX_MAX20410 on Mid Layer 1 "NONET_L01_P-001" (solid, pour order 0): 17.6,27.15 20.3,27.15 20.3,24.1 20.75,24.1 24.47,24.1 24.47,22.25 17.6,22.25
LX_MAX20410 on Mid Layer 1 "NONET_L01_P-001" (solid, pour order 38): 18.63,26.75 19.3,26.75 19.462,26.4 19.462,23.425 18.462,23.425 18.462,26.4
LX_MAX20410 on Mid Layer 1 "NONET_L01_P-001" (solid, pour order 28): 24.45,22.2 18.35,22.2 18.45,22.3 18.45,24.45 24.45,24.45
GND on Mid Layer 1 "NONET_L01_P-001" (solid, pour order 25): 0,85 77.75,85 77.75,0 0,0
GND on Mid Layer 2 "NONET_L01_P-001" (solid, pour order 2): 0,85 77.75,85 77.75,0 0,0
+5 on Top Layer 1 "Top Layer 1-+5" (solid, pour order 8): 0,32.65 29.95,32.65 29.95,37.5 5.2,37.5 5.2,59.125 7.75,59.125 19.15,59.125 19.15,85 0,85 0,35.95
GND on Top Layer 1 "NONET_L01_P-001" (solid, pour order 34): 0,85 77.75,85 77.75,0 0,0
VSUP_MAX20410 on Top Layer 1 "Top Layer 1-VSUP_MAX20410" (solid, pour order 27): 4.2,18.35 51.8,18.35 51.8,30.5 30.3,30.5 30.3,27.15 23.525,27.15 22.7,26.325 21.65,26.325 21.1,25.475 19.55,25.15 19.55,24.95 20.425,24.925 21.7,24.475 28.506,24.475 28.506,21.306 28.3,21.1 9.1,21.1 8.877,21.323 8.877,24.475 9.406,24.475 16.093,24.475 17.446,24.953 18.321,24.978 18.321,25.178 16.771,25.503 16.221,26.353 15.171,26.353 14.374,27.15 4.2,27.15
LX_MAX20410 on Top Layer 1 "NONET_L01_P-001" (solid, pour order 19): 16.35,32.15 21.6,32.15 21.6,29.05 19.5,26.25 18.45,26.25 16.35,29.1
+LiPo_22.2Vnom on Top Layer 1 "NONET_L01_P-001" (solid, pour order 32): 55.75,11 2.6,11 2.6,0 55.75,0
VIN_TPS2663 on Top Layer 1 "NONET_L01_P-001" (solid, pour order 10): 52.05,15.445 47.725,15.445 47.725,9.375 51.27,9.375 52.05,10.155
GND on Top Layer 1 "NONET_L01_P-001" (solid, pour order 36): 2.8,39.39 65.25,39.39 65.25,0 2.8,0
BIAS_MAX20410 on Top Layer 1 "NONET_L01_P-001" (solid, pour order 15): 15.1,24.6 17.662,24.6 17.662,22.55 15.1,22.55
BST_MAX20410 on Top Layer 1 "NONET_L01_P-001" (solid, pour order 17): 22.85,24.65 20.262,24.65 20.262,22.55 22.85,22.55
GND on Top Layer 1 "NONET_L01_P-001" (solid, pour order 37): 16.809,24.728 20.03,24.728 20.03,21.65 16.75,21.65
GND on Bottom Layer 1 "NONET_L01_P-001" (solid, pour order 4): 0,85 77.75,85 77.75,0 0,0

## Keep-outs
Keep-Out Layer:
  lines w0.2: 0,5 ccw(c5,5) 5,0 60,0 ccw(c60,5) 65,5 65,80 ccw(c60,80) 60,85 5,85 ccw(c5,80) 0,80 0,5
  lines w0.254: 0,5 0,5 ; 5,0 5,0 ; 65,5 65,5

## Silkscreen, mask and mechanical layers (free items; w line width, h text height)
Top Overlay:
  text "Machine Intelligence Lab Buoy Board v1 / Designed by - Erik Neff-Flahan, Jack Rainville, Russell MacGregor" at 64.449,31.211 h1 r90

## Text inside footprints (layer, text, board x,y; h text height)
C_NP: Top Overlay "+" at 12.012,71.738 h1.2; Top Overlay "+" at 13.282,66.15 h1.2
COUT_1: Top Overlay "+" at 32.362,24.562 h1.2 r90; Top Overlay "+" at 37.95,25.832 h1.2 r90